# Allegro board C1T139A30_V1.2.brd
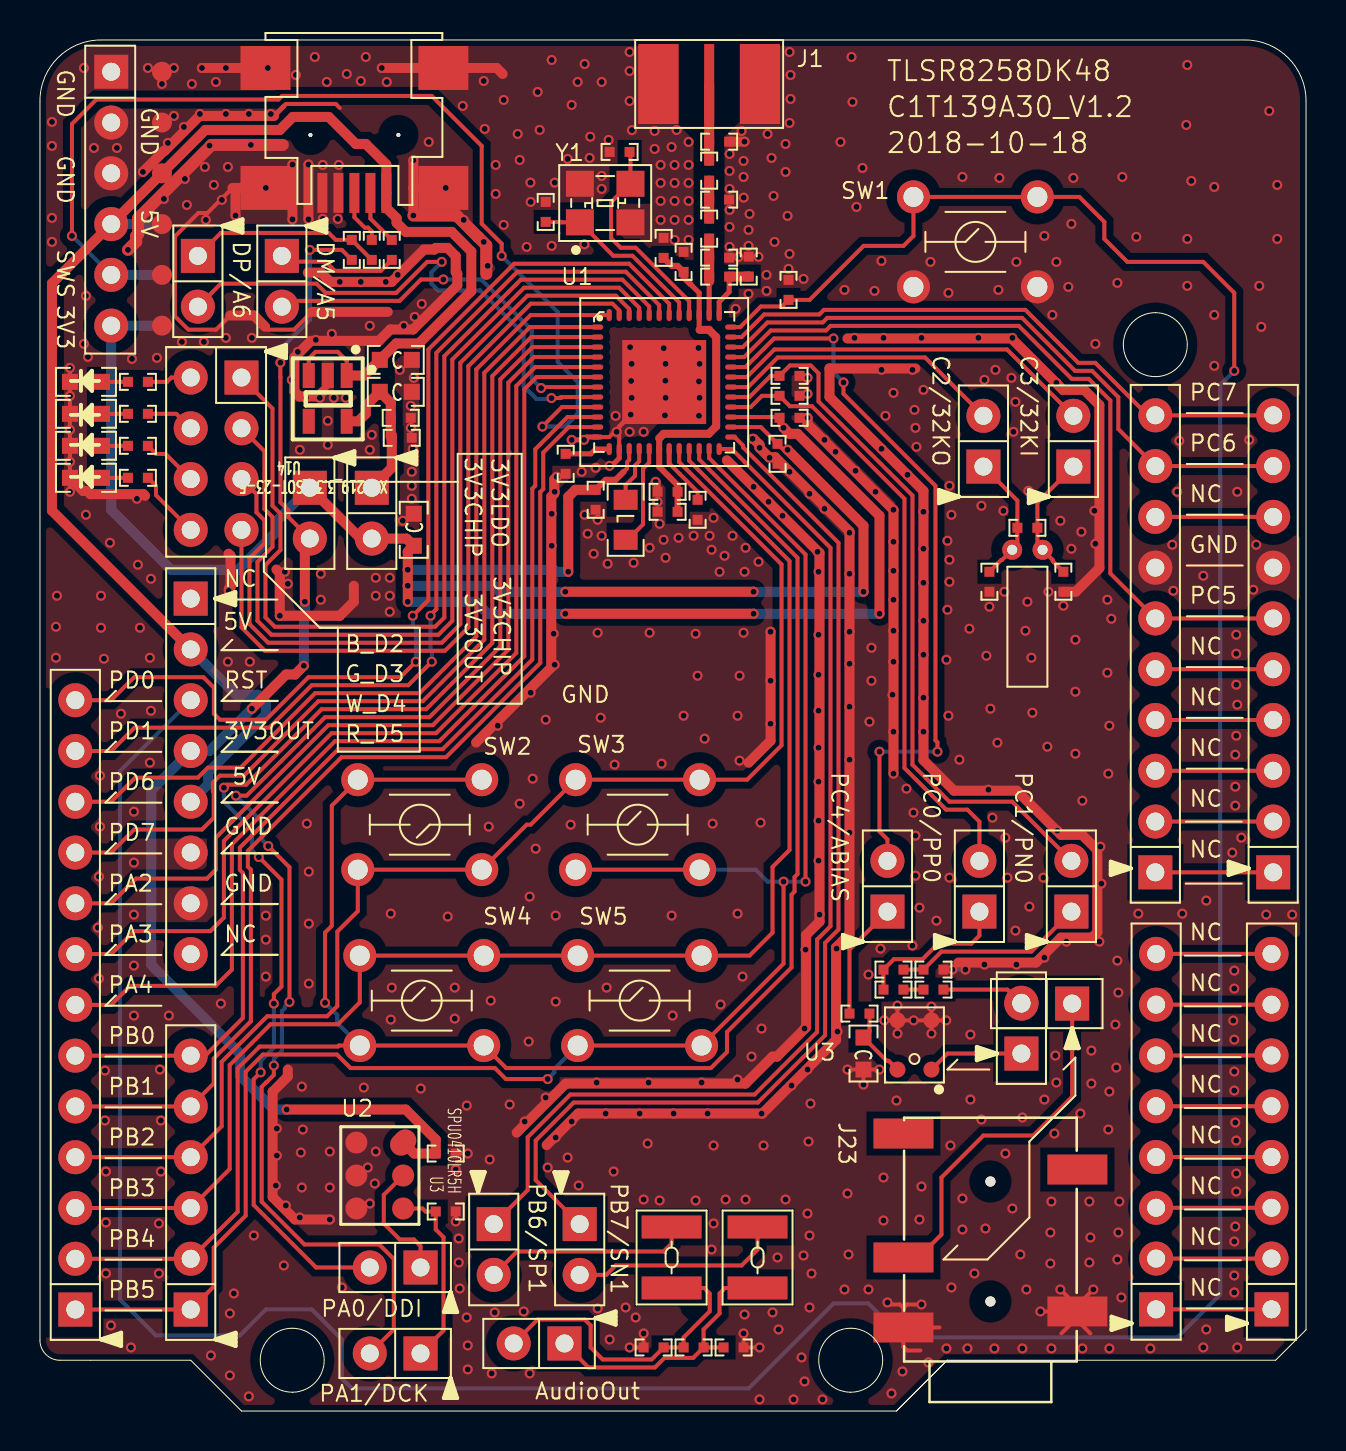
[diagram p0: board, top side]
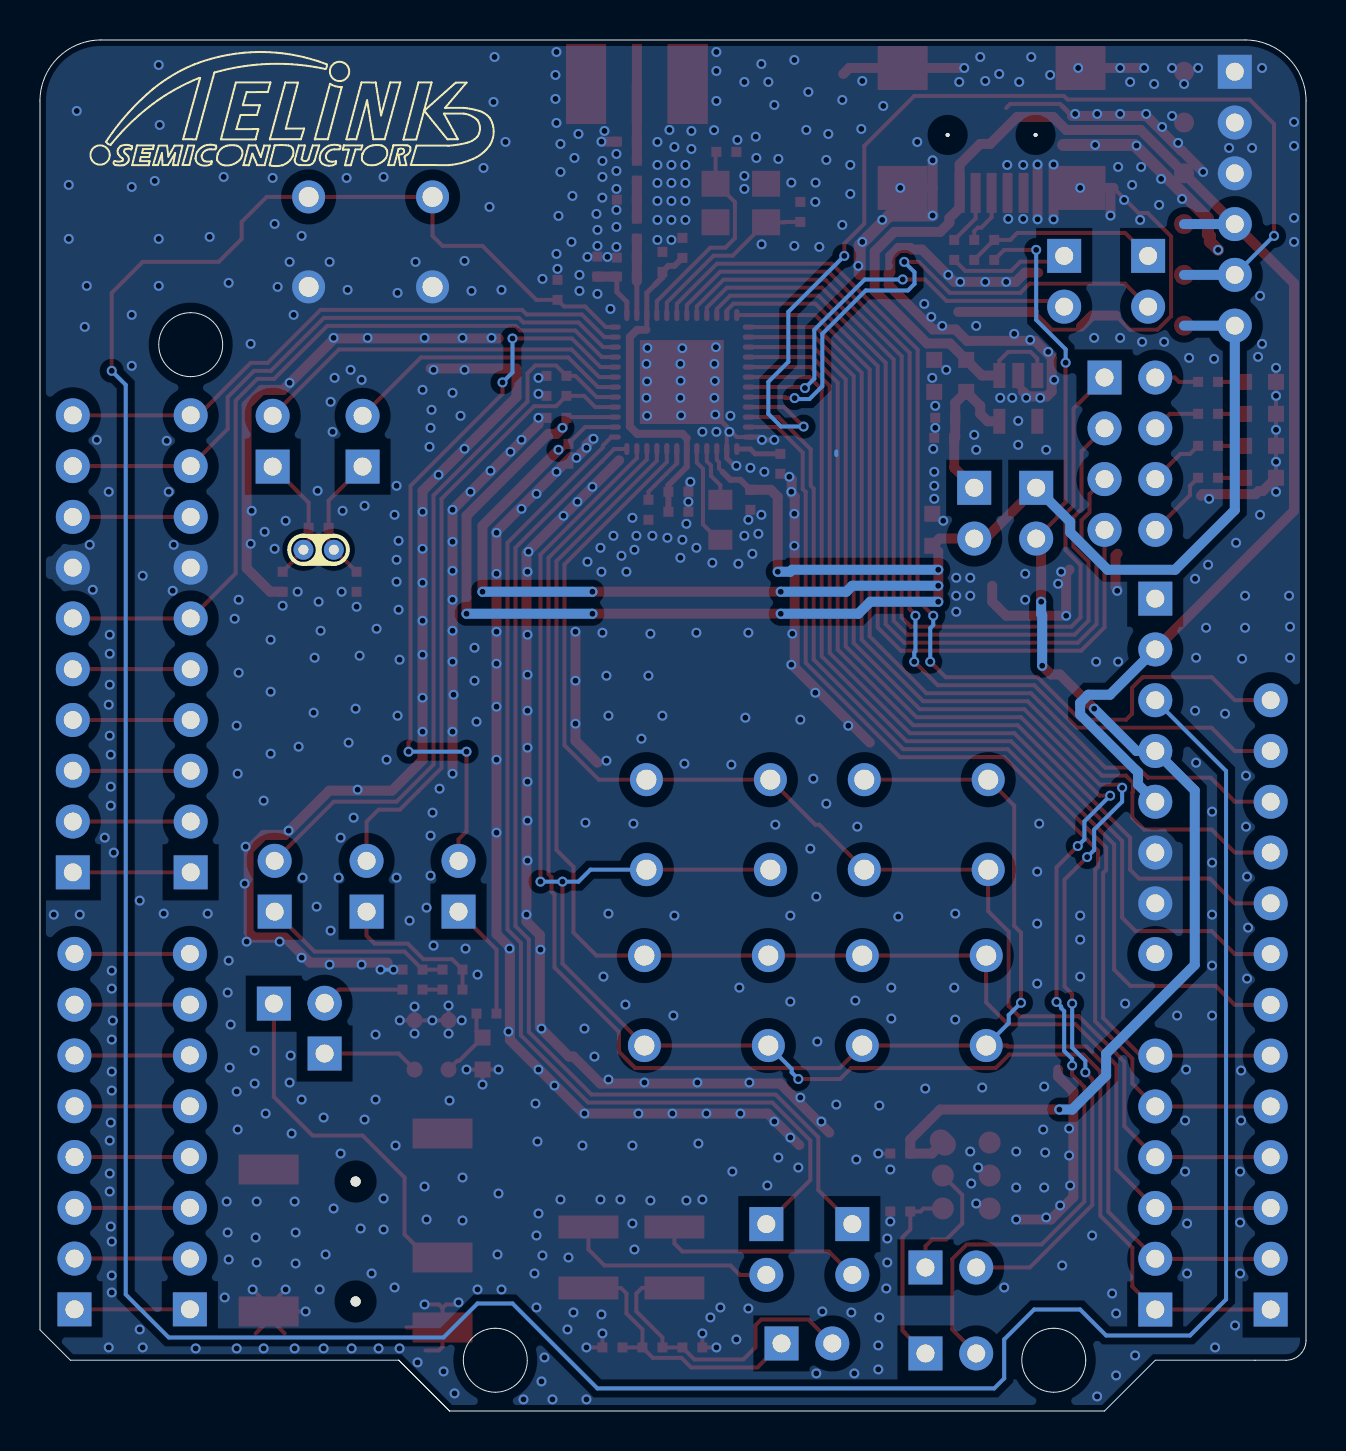
[diagram p1: board, bottom side, seen from below]

Outline 63.34 x 68.58 mm; copper layers: TOP, BOTTOM. Coordinates in mm from the lower left corner of the outline.
Outline path: 42.85,0 10.08,0 7.54,2.54 1,2.54 arc(0.29,2.83) 0,3.54 0,65.53 arc(0.89,67.69) 3.05,68.58 60.29,68.58 arc(62.45,67.69) 63.34,65.53 63.34,4.06 61.82,2.54 45.39,2.54 ; 42.85,0 45.39,2.54 ; 42.85,0 45.39,2.54 ; 12.62,4.14 arc(14.22,2.54) 12.62,0.94 arc(11.02,2.54) 12.62,4.14 ; 40.56,4.14 arc(42.16,2.54) 40.56,0.94 arc(38.96,2.54) 40.56,4.14 ; 55.8,54.94 arc(57.4,53.34) 55.8,51.74 arc(54.2,53.34) 55.8,54.94

## Placement (name value [footprint] x y rotation side)
C1  0.1uF  [0402]  32.2 57.48 270 top
C2  2.2uF  [0402]  31.2 58.18 270 top
C3  NC  [0402]  29 62.98 0 top
C4  NC  [0402]  25.3 59.98 270 top
C5  1.2pF  [0402]  33.98 57.69 180 top
C6  1.8pF  [0402]  33.98 60.59 180 top
C7  1pF  [0402]  33.98 63.49 180 top
C8  220pF  [0402]  33.48 59.14 90 top
C9  18pF  [0402]  35.46 57.25 90 top
C10  NC  [0402]  47.5 41.48 90 top
C11  NC  [0402]  51.2 41.48 90 top
C12  1uF  [0402]  37.5 49.68 0 top
C13  1uF  [0402]  36.9 47.88 270 top
C14  1uF  [0402]  26.3 47.38 90 top
C15  1uF  [0402]  37.45 56.08 270 top
C16  1uF  [0402]  27.8 45.58 270 top
C17  0.1uF  [0402]  31.4 45.98 180 top
C18  1uF  [0402]  31.4 44.98 180 top
C19  1uF  [0402]  32.9 45.08 270 top
C20  NC  [0402]  30.7 3.18 0 top
C21  220nF  [0402]  32.7 3.18 0 top
C22  0.1uF  [0402]  20.3 12.88 0 top
C23  NC  [0402]  34.7 3.18 0 top
C24  1uF  [0402]  44.7 21.08 0 top
C25  10pF  [0402]  37.5 50.78 180 top
C26  4.7uF  [0603C]  41.2 17.88 270 top
C27  1uF  [0402]  44.7 22.08 0 top
C28  10pF  [0402]  37.5 51.78 0 top
C29  10uF  [0603C]  18.7 44.08 90 top
C30  10uF  [0603C]  17.8 52.58 0 top
C31  10uF  [0603C]  17.8 50.98 0 top
C32  1nF  [0402]  18.1 48.68 0 top
C33  0.1uF  [0402]  18.05 49.68 0 top
D1  Blue  [0603-LED]  2.3 51.48 180 top
D2  Green  [0603-LED]  2.3 49.88 180 top
D3  White  [0603-LED]  2.3 48.28 180 top
D4  Red  [0603-LED]  2.3 46.68 180 top
J1  RFIN  [SMA-H]  33.48 66.38 270 top
J2  32KPC3  [HDR254F-1X2X850]  51.7 49.78 270 top
J4  32KPC2  [HDR254F-1X2X850]  47.2 49.78 270 top
J6  HEADER 13  [HDR254F-1X13X850]  1.77 35.56 270 top
J7  Left_Ardunio  [HDR254F-1X8X850]  7.54 22.86 90 top
J8  Right_Ardunio  [HDR254F-1X10X850]  55.8 49.81 270 top
J9  Right_Telink  [HDR254F-1X10X850]  61.7 49.81 270 top
J11  Right_Ardunio  [HDR254F-1X8X850]  55.84 22.87 270 top
J12  Right_Telink  [HDR254F-1X8X850]  61.61 22.87 270 top
J13  Left_Ardunio  [HDR254F-1X6X850]  7.54 17.78 270 top
J16  SDMB4  [HDR254F-1X2X850]  22.7 6.81 90 top
J17  SDMB5  [HDR254F-1X2X850]  27 6.81 90 top
J18  Debug  [HDR254F-1X6X850_TELINKDEBUG]  3.56 54.29 90 top
J20  MICPC4  [HDR254F-1X2X850]  42.4 27.52 270 top
J22  MICPC0  [HDR254F-1X2X850]  47 27.52 270 top
J23  PJ327  [PJ-327]  47.55 2.48 180 top
J25  MICPC1  [HDR254F-1X2X850]  51.6 27.52 270 top
J26  USB_MiniABF  [USB-MINI-F5]  15.73 60.93 180 top
J27  DM/A5  [HDR254F-1X2X850]  12.1 55.24 90 top
J28  DP/A6  [HDR254F-1X2X850]  7.9 55.24 90 top
J29  Chip3V3  [HDR254F-1X2X850]  16.6 43.64 90 top
J35  IO3V3  [HDR254F-1X2X850]  13.5 43.64 90 top
J36  MICIN  [HDR254F-1X2X850]  49.1 20.42 270 top
J37  LINEIN  [HDR254F-1X2X850]  49.1 20.38 0 top
J38  LED  [HDR254F-2X4X850]  10.08 41.54 90 top
J39  AudioOut  [HDR254F-1X2X850]  23.7 3.38 0 top
J40  DMICCK  [HDR254F-1X2X850]  16.5 2.88 0 top
J41  DMICDI  [HDR254F-1X2X850]  16.5 7.18 0 top
L1  1.3nH  [0402]  33.98 56.74 180 top
L2  3.3nH  [0402]  33.48 62.04 90 top
L3  47uH  [0805L]  29.3 44.58 90 top
L4  150uH  [INDM3025X25]  31.6 7.68 270 top
L5  150uH  [INDM3025X25]  35.9 7.68 270 top
R1  NC  [0402]  49.4 44.18 0 top
R2  100K  [0402]  20.3 9.98 180 top
R3  1K  [0402]  4.9 51.48 180 top
R4  1K  [0402]  4.9 49.88 180 top
R5  1K  [0402]  4.9 48.28 180 top
R6  1K  [0402]  4.9 46.68 180 top
R7  0R  [0402]  41 19.88 0 top
R8  000R  [0402]  42.7 21.08 0 top
R9  NC  [0402]  42.7 22.08 0 top
R10  33  [0402R]  17.6 58.08 270 top
R11  33  [0402R]  16.6 58.08 270 top
R12  NC/1.5K  [0402R]  15.6 58.08 270 top
SW1  SW4PIN_4.5x4.5  [BUTDIP4P_5P0X3P0]  46.8 58.48 0 top
SW2  Key1  [BUTDIP4P_5P0X3P0]  19 29.33 180 top
SW3  Key2  [BUTDIP4P_5P0X3P0]  29.9 29.33 0 top
SW4  Key3  [BUTDIP4P_5P0X3P0]  19.1 20.53 0 top
SW5  Key4  [BUTDIP4P_5P0X3P0]  30 20.53 0 top
U1  TLSR8258F512ET48  [QFN_7X7_48PIN_0P5_4P20X4P20]  31.23 51.47 0 top
U2  SPM0423HM4H-WB  [DMIC_SPM0423HM4H-WB]  17 11.78 270 top
U3  MWW7037AT2  [GA_BFA423_A83]  43.75 18.31 180 top
U4  CE1132-33M  [SOT-23-5]  14.4 50.65 180 top
Y1  24MHz-12pF-+/-20ppm  [OSCCC250X320X110]  28.28 60.42 90 top
Y2  32.768KHz - 9pf - +/-20ppm  [OSC_2X6]  49.4 39.08 90 top

## Library data of the parts
C1 C2 C12 C13 C16-C19 C22 C29-C33 = C1005X5R1C104K
C3 C4 C20 C23 = C1005_NC
C5-C8 C10 C11 = C1608_NC
C9 = C1005C0G1H100D
C14 C15 C24 C27 = C1005X5R1C105K
C21 = C1005X5R1C224M
C25 C28 = C1005C0G1H223J
C26 = C1608X5R0J475M
D1-D4 = 0603D_Green
J1 = SMA_JACK_2
J2 J4 J16 J17 J20 J22 J25 J27-J29 J35-J37 J39-J41 = B2S_3: User Part Number: pn; Tolerance: RichardLC
J6 = HEADER 13: User Part Number: pn; Tolerance: RichardLC
J7 J11 J12 = HEADER 8: User Part Number: pn; Tolerance: RichardLC
J8 J9 = HEADER 10: Tolerance: RichardLC; User Part Number: pn
J13 = HEADER 6: User Part Number: pn; Tolerance: RichardLC
J18 = CON_0.54mm_2x6: User Part Number: pn; Tolerance: RichardLC
J23 = PJ327_2
J26 = USB_MiniABF_5pin: Tolerance: RichardLC; User Part Number: pn
J38 = HEADER 4X2: User Part Number: pn; Tolerance: RichardLC
L1 L2 = MLK1608_000R
L3 = IND_0
L4 L5 = IND_150uH_3025
R1 = RS0603K102JT
R2 = RS0402K104JT
R3-R6 = RS0402K102JT
R7-R9 = RS0402K472JT
R10 R11 = RS0603K330JT
R12 = RS0603K152JT
SW1-SW5 = SW4PIN_0.5
U1 = TLSR8258F512ET48
U2 = LD1117/SO_0
U3 = MULPS4CX-RM5_0
U4 = XC6219_6.3V_SOT-23-5
Y1 = CRYSTAL4/SM_0: Tolerance: RichardLC
Y2 = OSC_2x6_2pin_16Mhz

## Footprints (pads in the part's own frame, mm; a bottom-side part is the same pattern mirrored in y, then rotated)
0402
  rect 0.5x0.5 smd: 1(-0.5,0) 2(0.5,0)
0402R
  rect 0.5x0.5 smd: 1(-0.5,0) 2(0.5,0)
0603-LED
  rect 0.8x0.8 smd: A(-0.8,0) C(0.8,0)
0603C
  rect 0.8x0.8 smd: 1(-0.8,0) 2(0.8,0)
0805L
  rect 1x1.2 smd: 1(-1,0) 2(1,0)
BUTDIP4P_5P0X3P0
  round 1.65 hole 1: 1(-3.1,2.25) 2(-3.1,-2.25) 3(3.1,2.25) 4(3.1,-2.25)
DMIC_SPM0423HM4H-WB
  round 1.1 smd: 1(-1.65,-1.17) 2(0,-1.17) 3(1.65,-1.17) 4(1.65,1.17) 5(0,1.17)
  oval 1.4x1.1 smd rot 135: 6(-1.65,1.17)
GA_BFA423_A83
  round 0.8 smd: 1(-0.85,1.23) 2(-0.85,-1.23) 3(0.85,-1.23) 4(0.85,1.23)
HDR254F-1X2X850
  rect 1.7x1.7 hole 0.9: 1(2.54,0)
  round 1.7 hole 0.9: 2(0,0)
HDR254F-1X6X850
  rect 1.7x1.7 hole 0.9: 1(12.7,0)
  round 1.7 hole 0.9: 2(10.16,0) 3(7.62,0) 4(5.08,0) 5(2.54,0) 6(0,0)
HDR254F-1X6X850_TELINKDEBUG
  rect 1.7x1.7 hole 0.9: 1(12.7,0)
  round 1.7 hole 0.9: 2(10.16,0) 3(7.62,0) 4(5.08,0) 5(2.54,0) 6(0,0)
  round 1 smd: 7(0,-2.54) 8(2.54,-2.54) 9(5.08,-2.54) 10(7.62,-2.54) 11(10.16,-2.54) 12(12.7,-2.54)
HDR254F-1X8X850
  rect 1.7x1.7 hole 0.9: 1(17.78,0)
  round 1.7 hole 0.9: 2(15.24,0) 3(12.7,0) 4(10.16,0) 5(7.62,0) 6(5.08,0) 7(2.54,0) 8(0,0)
HDR254F-1X10X850
  rect 1.7x1.7 hole 0.9: 1(22.86,0)
  round 1.7 hole 0.9: 2(20.32,0) 3(17.78,0) 4(15.24,0) 5(12.7,0) 6(10.16,0) 7(7.62,0) 8(5.08,0) 9(2.54,0) 10(0,0)
HDR254F-1X13X850
  rect 1.7x1.7 hole 0.9: 1(30.48,0)
  round 1.7 hole 0.9: 2(27.94,0) 3(25.4,0) 4(22.86,0) 5(20.32,0) 6(17.78,0) 7(15.24,0) 8(12.7,0) 9(10.16,0) 10(7.62,0) 11(5.08,0) 12(2.54,0) 13(0,0)
HDR254F-2X4X850
  rect 1.7x1.7 hole 0.9: 1(10.16,0)
  round 1.7 hole 0.9: 2(10.16,2.54) 3(7.62,0) 4(7.62,2.54) 5(5.08,0) 6(5.08,2.54) 7(2.54,0) 8(2.54,2.54)
INDM3025X25
  rect 1.15x3 smd: 1(-1.525,0) 2(1.525,0)
OSC_2X6
  round 1 hole 0.5: 1(4,0.76) 2(4,-0.76)
OSCCC250X320X110
  rect 1.3x1.4 smd: 1(-0.965,1.265) 2(-0.965,-1.265) 3(0.965,-1.265) 4(0.965,1.265)
PJ-327
  round 0.5 hole 1: (0,-3) (0,-9)
  rect 3x1.5 smd: 1(-4.35,-2.5) 2(4.35,-5.2) 3(-4.35,-9.6) 4(4.35,-11.4) 5(4.35,-1.7)
QFN_7X7_48PIN_0P5_4P20X4P20
  oval 0.6x0.26 smd: 1(-3.35,2.75) 2(-3.35,2.25) 3(-3.35,1.75) 4(-3.35,1.25) 5(-3.35,0.75) 6(-3.35,0.25) 7(-3.35,-0.25) 8(-3.35,-0.75) 9(-3.35,-1.25) 10(-3.35,-1.75) 11(-3.35,-2.25) 12(-3.35,-2.75) 25(3.35,-2.75) 26(3.35,-2.25) 27(3.35,-1.75) 28(3.35,-1.25) 29(3.35,-0.75) 30(3.35,-0.25) 31(3.35,0.25) 32(3.35,0.75) 33(3.35,1.25) 34(3.35,1.75) 35(3.35,2.25) 36(3.35,2.75)
  oval 0.26x0.6 smd: 13(-2.75,-3.35) 14(-2.25,-3.35) 15(-1.75,-3.35) 16(-1.25,-3.35) 17(-0.75,-3.35) 18(-0.25,-3.35) 19(0.25,-3.35) 20(0.75,-3.35) 21(1.25,-3.35) 22(1.75,-3.35) 23(2.25,-3.35) 24(2.75,-3.35) 37(2.75,3.35) 38(2.25,3.35) 39(1.75,3.35) 40(1.25,3.35) 41(0.75,3.35) 42(0.25,3.35) 43(-0.25,3.35) 44(-0.75,3.35) 45(-1.25,3.35) 46(-1.75,3.35) 47(-2.25,3.35) 48(-2.75,3.35)
  rect 4.2x4.2 smd: 49(0,0)
SMA-H
  rect 4x0.5 smd: 1(0,0)
  rect 4x2 smd: 2(0,-2.54) 3(0,2.54) 4(0,-2.54) 5(0,2.54)
SOT-23-5
  rect 0.6x1.25 smd: 1(-0.95,-1.145) 2(0,-1.145) 3(0.95,-1.145) 4(0.95,1.145) 5(-0.95,1.145)
USB-MINI-F5
  round 0.2 hole 0.9 unplated: (-2.2,-2.9) (2.2,-2.9)
  rect 0.5x2 smd: 1(-1.6,0) 2(-0.8,0) 3(0,0) 4(0.8,0) 5(1.6,0)
  rect 2.5x2.2 smd: 6(-4.45,-6.25) 7(4.45,-6.25) 8(-4.45,-0.25) 9(4.45,-0.25)

## Nets
1V2: C1.2 C2.2 C17.1 C18.1 U1.18(VDD1V2) U1.39(AVDD1V2)
3V3: C31.1 C32.1 C33.1 J29.1 U4.5(VOUT)
GND: C1.1 C2.1 C3.1 C4.1 C5.1 C6.1 C7.1 C9.2 C10.1 C11.1 C12.2 C13.2 C14.1 C15.1 C16.2 C17.2 C18.2 C19.2 C20.1 C22.2 C23.2 C25.1 C26.2 C27.2 C28.2 C29.2 C30.2 C31.2 C32.2 C33.2 D1.C(CATHODE) D2.C(CATHODE) D3.C(CATHODE) D4.C(CATHODE) J1.2 J1.3 J1.4 J1.5 J7.6 J7.7 J8.7 J9.7 J18.1 J18.2 J18.3 J18.10 J18.11 J18.12 J23.1 J23.5 J26.4(ID) J26.5(GND) J26.6(S1) J26.7(S2) J26.8(S3) J26.9(S4) R2.1 SW1.2 SW1.4 U1.12(DVSS#12) U1.14(DVSS#14) U1.49(GND) U2.1(GND#1) U2.2(SE) U2.3(GND#3) U3.2(GND#2) U3.3(GND#3) U4.2(VSS) Y1.2 Y1.4
TL_5V: C30.1 J7.2 J7.5 J18.4 J18.9 J26.1(V_BUS) U4.1(VIN) U4.3(CE)
TL_32KI_C3: J2.2 U1.31(P1/URX/I2CCK/32KI/PGAN1/C[3])
TL_32KO_C2: J4.2 U1.30(P0/7816TRX/I2CSDA/32KO/PGAP1/C[)
TL_AS0_C5: J8.6 J9.6 U1.33(P3N/URX/ATSEL0/C[5])
TL_AS1_C6: J8.9 J9.9 U1.34(CYC2LNA/ATSEL1/P4N/C[6])
TL_AS2_C7: J8.10 J9.10 U1.35(CYC2PA/ATSEL2/P5N/C[7])
TL_BIAS_C4: J20.2 U1.32(P2/UCTS/P0N/BIAS/C[4])
TL_CK_A4: J6.7 U1.6(CK/URTS/P2/A[4])
TL_CN_D6: J6.11 U1.48(CN/URX/ATSEL0/D[6])
TL_D0: J6.13 U1.42(CYC2LNA/7816TRX/D[0])
TL_D1: J6.12 U1.43(CYC2PA/UCTS/D[1])
TL_D7: J6.10 U1.1(CK/I2SBCK/7816TRX/D[7])
TL_DI_A3: J6.8 U1.5(DI/UCTS/P1/A[3])
TL_DM_A5: J27.2 U1.7(DM/A[5])
TL_DMICCK_A1: J40.2 U1.3(DMIC_CK/7816CLK/I2SCK/A[1])
TL_DMICDI_A0: J41.2 U1.2(DMIC_DI/P0N/URX/A[0])
TL_DO_A2: J6.9 U1.4(DO/UTX/P0/A[2])
TL_DP_A6: J28.2 U1.8(DP/A[6])
TL_IO: C22.1 J7.4 J35.2 R12.2 U2.6(POWER)
TL_KEY_B2: J6.4 J13.4 SW2.1 SW2.3 SW3.1 SW3.3 U1.20(P5/UCTS/CYC2LNA/B[2])
TL_KEY_B3: J6.3 J13.3 SW4.1 SW4.3 SW5.1 SW5.3 U1.21(P0N/URTS/CYC2PA/B[3])
TL_KEY_B4: J6.2 J13.2 SW2.2 SW2.4 SW4.2 SW4.4 U1.22(SDMP0/P4/B[4])
TL_KEY_B5: J6.1 J13.1 SW3.2 SW3.4 SW5.2 SW5.4 U1.23(SDMN0/P5/B[5])
TL_P0_D5: J38.7 U1.47(P0/P0N/D[5])
TL_P1N_D3: J38.3 U1.45(P1N/I2SSDI/7816TRX/D[3])
TL_P2N_D4: J38.5 U1.46(SWM/I2SSDO/P2N/D[4])
TL_P3_D2: J38.1 U1.44(CN/I2SLR/P3/D[2])
TL_PGAN0_C1: C28.1 J25.2 U1.29(I2CCK/P1N/P0/PGAN0/C[1])
TL_PGAP0_C0: C25.2 J22.2 U1.28(I2CSDA/P4N/URTS/PGAP0/C[0])
TL_RST: C15.2 J7.3 SW1.1 SW1.3 U1.36(RESETB)
TL_SDMN1_B7: J17.1 U1.25(SDMN1/DO/URX/B[7])
TL_SDMP1_B6: J16.1 U1.24(SDMP1/DI/URTS/B[6])
TL_SWS_A7: J18.5 J18.8 U1.9(SWS/URTS/A[7])
TL_URX_B0: J6.6 J13.6 U1.10(P3/URX/ATSEL1/B[0])
TL_UTX_B1: J6.5 J13.5 U1.11(P4/UTX/ATSEL2/B[1])
TL_VANT: C12.1 C13.1 C16.1 C29.1 J18.6 J18.7 J29.2 J35.1 U1.15(VDD_IO) U1.26(VDD3) U1.27(VDDIO_AMS)
TL_XC1: C3.2 U1.40(XC1) Y1.3
TL_XC2: C4.2 U1.41(XC2) Y1.1
N19472288: J38.4 R4.1
N19472291: J38.8 R6.1
N19472372: J16.2 L4.1
N19472375: J17.2 L5.1
N19472414: C20.2 C21.1 J39.2 L4.2
N19472431: C21.2 C23.1 J39.1 L5.2
N19472505: J38.2 R3.1
N19497696: J38.6 R5.1
N19519268: C11.2 J2.1 R1.2 Y2.2
N19519271: C10.2 J4.1 R1.1 Y2.1
N19526123: J28.1 R11.2 R12.1
N19526133: J26.3(D+) R11.1
N19526168: J26.2(D-) R10.1
N19527038: J27.1 R10.2
N19571642: C19.1 U1.19(VDD_F)
N19571697: C14.2 U1.13(VDD1V)
N19571729: L3.1 U1.17(VDCDC)
N19571735: L3.2 U1.16(VDCDC_SW)
N19572953: C6.2 C8.2 L2.1
N19572955: C5.2 C8.1 L1.2 U1.38(ANT)
N19572993: C9.1 L1.1 U1.37(VANT)
N19573037: C7.2 J1.1 L2.2
N19581488: J20.1 R7.1
N19581490: C27.1 J25.1 R9.2
N19581502: C26.1 R7.2 U3.4(VDD)
N19581582: J22.1 R8.1 R9.1
N19581635: C24.1 R8.2
N19581732: J23.2 J37.1
N19602515: C24.2 J36.2 J37.2
N19606656: J40.1 R2.2 U2.4(CLOCK)
N19606659: J41.1 U2.5(DATA)
N19611810: J8.5 J9.5
N19611817: J8.4 J9.4
N19611824: J8.3 J9.3
N19611831: J8.2 J9.2
N19611838: J8.1 J9.1
N19611845: J8.8 J9.8
N19611852: J11.8 J12.8
N19611859: J11.6 J12.6
N19611866: J11.7 J12.7
N19611873: J11.5 J12.5
N19611880: J11.4 J12.4
N19611887: J11.3 J12.3
N19611894: J11.2 J12.2
N19611901: J11.1 J12.1
N194723011: D4.A(ANODE) R6.2
N194723090: D1.A(ANODE) R3.2
N194723171: D2.A(ANODE) R4.2
N194723250: D3.A(ANODE) R5.2
N195815302: J36.1 U3.1(OUTPUT)

Pads without a net: J7 1 8; J23 3 4; U4 4

## Via types
v1: diameter 0.5, hole 0.3, TOP to BOTTOM, 782 vias

## Routing (per net, layer and track width the routed paths; a pad name or vN(x,y) marks a point on that pad's centre or on a via; arc(x,y) is an arc through that point)
1V2: length 17.1
  TOP w0.25: 33,54.08 32.98,54.1 U1.39 32.98,55.93 32.55,56.36
  TOP w0.3: C2.2 31.6,57.28 31.9,57.28 C1.2 32.2,56.71 32.55,56.36 ; 30.98,48.66 U1.18 30.98,47.23 31.9,46.31 C17.1 C18.1
  TOP w0.4: 30.98,48.66 31.2,48.88 33.46,48.88 33.83,49.25 33.83,53.72 33.47,54.08 33,54.08
3V3: length 8
  TOP w0.5: U4.5 15.93,49.51 16.3,49.88 16.3,50.28 C31.1 17.55,50.43 C33.1 17.55,48.73 C32.1 17.6,47.18 J29.1
GND: length 373.1
  TOP w0.2: U3.3 v1(43.71,19.54) U3.2 ; U3.3 v1(42.24,19.54) ; U3.3 v1(42.9,20.28) ; U3.3 v1(42.9,18.88) ; v1(30.2,3.88) C20.1 v1(29.5,3.18) ; 12.21,65.27 12.31,65.38 14.8,65.38 15,65.18 ; R2.1 v1(20.8,9.48) ; v1(51.05,6.08) 51.9,5.23 ; 51.9,5.23 J23.1 ; 51.9,5.23 51.9,5.28 v1(52.7,6.08) ; Y1.2 29.72,59.46 30.02,59.16 ; U1.49 28.48,48.72 U1.12 ; 43.2,5.15 43.38,5.33 v1(44.1,5.33) ; 43.2,5.15 J23.5 ; 43.2,5.15 43.02,5.33 42.3,5.33 ; 14.17,51 14.4,51.23 U4.2 ; 9.52,54.8 8.81,54.09 7.42,54.09 6.75,54.76 6.75,58.75 7.92,59.92 8.38,59.92 9.63,61.18 ; C26.2 v1(41.2,16.33) ; C26.2 v1(40.4,17.08) ; C26.2 v1(42,17.08) ; C25.1 38.3,50.78 v1(38.4,50.88) ; J23.5 45,4.18 ; J23.5 43.2,3.21 43.38,3.03 44.05,3.03 ; U3.2 v1(44.6,20.23) ; U3.2 v1(44.6,18.88) ; U3.2 v1(45.34,19.54) ; J23.1 v1(50.05,4.98) ; J23.1 51.9,4.68 ; 51.9,4.68 51.1,3.88 ; 51.9,4.68 51.9,4.53 52.55,3.88 ; v1(1.5,45.98) D4.C v1(1.5,47.48) D3.C v1(1.5,49.08) D2.C v1(1.5,50.78) D1.C v1(1.5,52.18) ; v1(38.4,51.68) 38.3,51.78 C28.2 ; 11.26,54.24 11.41,54.09 12.71,54.09 13.6,54.98 ; v1(36,3.18) C23.2 v1(35.2,3.88) ; C12.2 v1(38.4,49.68) ; C22.2 v1(21.4,12.88) ; v1(37.5,46.98) 37.1,47.38 C13.2 ; v1(29.55,49.84) 28.98,49.27 U1.14 ; C27.2 v1(45.65,22.08)
  TOP w0.25: 11.71,64.78 12.21,65.27 ; 28.7,47.38 28.98,47.66 U1.14 ; U1.12 27.36,48.72 v1(27.22,48.58) v1(26.6,48.58)
  TOP w0.3: C17.2 30.9,46.48
  TOP w0.5: 25.35,13.3 26.93,14.88 v1(28.3,14.88) v1(30,14.88) v1(31.7,14.88) v1(33.4,14.88) v1(36.1,14.88) 36.14,14.88 39.83,18.57 39.83,23.19 40.5,23.86 v1(40.5,28.93) v1(40.5,32.58) v1(40.5,35.23) v1(40.5,37.38) v1(40.5,38.98) v1(40.5,41.88) v1(40.5,43.93) 40.5,43.99 36.78,47.71 36.47,47.71 v1(36,48.18) 36,48.33 35.7,48.63 v1(35.65,48.63) ; v1(38.4,49.68) 38.4,49.37 42.7,45.07 v1(42.7,43.48) v1(42.7,42.03) v1(42.7,40.58) v1(42.7,39.03) v1(42.7,37.48) v1(42.7,33.98) 42.7,31.94 ; 5.26,45.78 5.18,45.86 2.53,45.86 2.37,46.02 2.16,46.02 D4.C ; 34.36,47.56 39,42.92 v1(39,24.83) 39,24.48 38.33,23.81 38.33,19.19 36.87,17.73 36.65,17.73 35.3,16.38 26.31,16.38 23.85,13.92 ; 11.83,42.09 12,41.92 v1(12,39.78) 15,39.78 15.7,40.48 15.7,41.28 ; 18.68,61.18 v1(18.68,59.8) ; 18.68,61.18 v1(18.68,62.56) ; 18.68,61.18 J26.8 v1(20.3,61.18) ; 21.82,33.43 25.58,37.19 25.58,45.74 25.73,45.89 25.73,46.61 v1(25.85,46.73) ; 14.17,51 13.92,50.75 12.97,50.75 12.73,51 12.73,52.7 13.56,53.53 16.96,53.53 17.53,54.1 18.67,54.1 20.88,56.31 20.88,56.89 20.8,56.97 20.8,57.77 20.39,58.18 19.81,58.18 19.73,58.1 19.21,58.1 17.59,56.48 v1(17.3,56.48) v1(16.05,56.48) v1(15,56.48) 14.52,56.48 14.06,56.94 13.4,56.94 ; v1(11.3,61.18) J26.9 9.78,61.18 ; 12.4,17.08 12.4,16.73 11.64,15.97 11.64,10.7 12.76,9.58 v1(14.5,9.58) ; 43.8,52.15 39.5,52.15 39.5,50.72 44.2,46.02 v1(44.2,44.98) v1(44.2,43.13) v1(44.2,41.43) v1(44.2,39.53) v1(44.2,37.83) v1(44.2,35.68) v1(44.2,33.98) 44.2,32.56 45.73,31.03 48.87,31.03 51.08,28.82 52.14,28.82 52.9,28.06 52.9,23.94 52.64,23.68 51.08,23.68 49.83,22.43 45.95,22.43 ; v1(8.1,67.18) J26.7 v1(11.4,67.18) ; C7.1 v1(35.25,63.49) ; 9.43,42.88 9.53,42.79 9.53,41.21 9.45,41.13 v1(9.45,41.03) ; v1(9.78,59.8) 9.78,61.18 ; 9.78,61.18 9.63,61.18 ; 23.15,66.88 22.85,67.18 J26.6 v1(17.1,67.18) ; 9.52,54.8 10.7,54.8 11.26,54.24 ; v1(12.63,62.35) v1(12.63,59.61) ; C11.1 51.82,40.98 53,42.16 53,50.32 52.24,51.08 51.18,51.08 48.61,53.65 40.4,53.65 ; 13.6,54.98 17.4,54.98 ; v1(36.55,38.98) v1(36.55,36.53) v1(36.55,34.38) 36.55,33.53 35.45,32.43 ; v1(13.43,62.35) v1(13.43,59.61) ; v1(5.15,61.98) 6.21,63.04 6.24,63.04 7.98,64.78 11.71,64.78
  TOP w0.6: v1(4.4,58.08) 4.81,58.49 4.81,58.77 4.91,58.87 4.91,59.66 8.58,63.33 v1(10.55,63.33) 12.15,63.33 ; 22.33,56.88 22.33,58.31 21.93,58.71 20.84,59.8 v1(18.68,59.8)
  BOTTOM w0.2: 23.5,48 23.5,47.82 ; v1(45.65,22.08) v1(46.3,22.08)
  vias: v1(0.6,64.48) v1(0.6,63.28) v1(0.6,59.68) v1(0.6,58.48) v1(0.85,40.78) v1(0.8,39.23) v1(0.8,37.68) v1(2.2,67.18) v1(2.2,53.38) v1(2.3,55.78) v1(2.3,44.83) v1(2.4,52.73) v1(2.7,63.18) v1(2.9,24.18) v1(3.05,40.78) v1(3.05,39.18) v1(3,31.78) v1(3,29.23) v1(2.95,26.73) v1(2.95,21.63) v1(3.2,37.63) v1(3.25,17.03) v1(3.25,14.53) v1(3.3,11.98) v1(3.3,9.43) v1(3.3,6.88) v1(3.5,43.43) v1(3.55,4.28) v1(3.85,63.18) v1(4.05,34.88) v1(4.55,3.18) v1(4.6,52.63) v1(4.7,29.98) v1(4.7,27.43) v1(4.7,24.83) v1(4.7,22.28) v1(4.7,19.78) v1(4.85,45.63) v1(4.9,42.33) v1(5,39.18) v1(5.4,67.18) v1(5.55,41.63) v1(5.5,37.68) v1(5.55,35.03) v1(5.5,32.43) v1(5.85,52.68) v1(6,17.08) v1(6.05,14.53) v1(6.05,11.98) v1(5.95,9.38) v1(5.95,6.88) v1(6.1,66.38) v1(6.2,60.63) v1(6.4,63.43) v1(6.45,19.78) v1(6.7,67.18) v1(6.7,64.78) v1(7.1,53.48) v1(7.2,64.23) v1(7.25,61.63) v1(7.35,60.33) v1(7.6,66.38) v1(8,64.88) v1(8.25,62.23) v1(8.2,53.48) v1(8.3,59.58) v1(8.48,63.3) v1(8.55,2.78) v1(8.7,61.33) v1(8.8,66.48) v1(9.1,60.58) v1(9.05,20.38) v1(9.3,67.18) v1(9.3,64.88) v1(9.3,53.68) v1(9.4,62.23) v1(9.4,37.48) v1(9.5,4.88) v1(9.5,1.78) v1(9.7,5.88) v1(10.45,64.88) v1(10.45,0.73) v1(10.5,37.48) v1(10.6,53.68) v1(10.7,8.78) v1(11.3,24.78) v1(11.3,23.58) v1(11.3,21.73) v1(11.55,64.88) v1(11.85,14.13) v1(11.85,12.78) v1(11.8,11.28) v1(12.25,41.98) v1(12.2,7.28) v1(12.3,10.28) v1(12.4,41.38) v1(12.6,51.58) v1(12.8,66.83) v1(12.9,52.98) v1(13,48.08) v1(13,9.68) v1(13.1,16.23) v1(13.05,12.93) v1(13.1,11.18) v1(13.15,14.08) v1(13.3,50.68) v1(13.35,29.38) v1(13.45,26.98) v1(13.45,24.38) v1(13.45,21.38) v1(13.75,67.73) v1(13.8,53.58) v1(14,50.68) v1(14.05,41.88) v1(14.05,40.58) v1(14.15,62.33) v1(14.15,59.63) v1(14.35,66.48) v1(14.4,49.53) v1(14.4,48.33) v1(14.5,12.98) v1(14.5,11.18) v1(14.6,53.88) v1(14.7,50.68) v1(14.95,62.33) v1(14.9,59.63) v1(15.1,6.18) v1(15.35,66.88) v1(15.3,50.68) v1(16.05,66.53) v1(16.2,16.18) v1(16.3,67.73) v1(16.4,12.18) v1(16.5,54.28) v1(16.5,48.08) v1(16.5,10.38) v1(16.6,48.83) v1(16.8,41.68) v1(16.8,40.78) v1(16.8,12.98) v1(16.75,11.38) v1(17.35,66.48) v1(17.5,41.68) v1(17.5,40.78) v1(17.5,39.98) v1(17.55,24.88) v1(17.6,21.18) v1(17.55,19.58) v1(17.9,56.83) v1(18,52.08) v1(18.15,44.53) v1(18.2,54.28) v1(18.55,50.28) v1(18.55,49.18) v1(18.65,48.13) v1(18.6,46.98) v1(18.6,46.28) v1(18.6,45.63) v1(18.7,51.68) v1(18.75,54.73) v1(19.1,55.38) v1(19.05,16.13) v1(19.45,63.48) v1(20.4,24.73) v1(20.75,21.18) v1(20.75,19.63) v1(20.8,12.08) v1(20.95,8.63) v1(20.95,7.43) v1(21,6.13) v1(21.15,65.28) v1(21.2,59.58) v1(21.35,15.28) v1(21.35,4.68) v1(21.4,3.28) v1(21.4,2.08) v1(22.2,66.53) v1(22.25,64.13) v1(22.2,58.48) v1(22.4,57.28) v1(22.45,29.23) v1(22.5,12.58) v1(22.55,20.53) v1(22.6,1.88) v1(22.8,62.33) v1(22.8,60.88) v1(22.75,4.93) v1(22.9,34.28) v1(23.2,65.58) v1(23.2,59.33) v1(23.5,15.33) v1(23.9,63.88) v1(24,62.58) v1(24,30.38) v1(24.25,14.48) v1(24.2,4.98) v1(24.35,58.23) v1(24.45,18.48) v1(24.54,61.45) v1(24.5,25.73) v1(24.5,1.88) v1(24.55,60.48) v1(24.55,35.93) v1(24.65,31.63) v1(24.8,28.13) v1(24.9,65.98) v1(25,64.08) v1(25.3,34.58) v1(25.3,15.68) v1(25.4,12.18) v1(25.6,67.58) v1(25.6,58.28) v1(25.6,44.88) v1(25.6,43.28) v1(25.7,38.88) v1(25.75,61.45) v1(25.75,45.98) v1(25.75,37.33) v1(25.8,24.78) v1(25.8,20.48) v1(25.8,13.68) v1(26.4,62.63) v1(26.4,12.68) v1(26.6,65.33) v1(26.55,29.33) v1(26.6,14.48) v1(26.9,66.48) v1(26.95,11.28) v1(27.1,46.98) v1(27.25,67.38) v1(27.24,58.36) v1(27.25,44.83) v1(27.4,43.88) v1(27.53,63.74) v1(27.5,62.68) v1(27.7,42.88) v1(27.8,47.18) v1(27.9,44.58) v1(27.9,38.93) v1(27.85,16.43) v1(27.9,5.13) v1(28.1,66.48) v1(28.1,61.78) v1(28.1,61.13) v1(28.1,43.78) v1(28.05,34.68) v1(28.45,63.58) v1(28.4,42.38) v1(28.35,21.18) v1(28.5,47.28) v1(28.5,3.58) v1(28.7,11.98) v1(28.8,49.78) v1(28.75,32.33) v1(28.85,48.98) v1(29.3,5.18) v1(29.5,67.98) v1(29.5,67.03) v1(29.5,65.53) v1(29.52,53.22) v1(29.5,48.98) v1(29.62,64.07) v1(29.6,52.38) v1(29.58,51.52) v1(29.6,50.68) v1(29.7,42.43) v1(29.8,4.68) v1(30.2,48.98) v1(30.2,10.58) v1(30.45,16.43) v1(30.4,13.38) v1(30.5,43.18) v1(30.5,38.93) v1(30.75,64.03) v1(30.75,63.13) v1(30.8,46.48) v1(30.9,45.48) v1(31,44.38) v1(31,10.53) v1(31.05,62.33) v1(31.05,61.43) v1(31.05,60.53) v1(31.05,59.58) v1(31.1,32.38) v1(31.2,53.16) v1(31.2,43.58) v1(31.3,52.38) v1(31.29,51.53) v1(31.3,50.68) v1(31.27,49.8) v1(31.3,42.68) v1(31.6,63.23) v1(31.6,24.78) v1(31.65,19.78) v1(31.75,62.33) v1(31.75,61.43) v1(31.75,60.53) v1(31.75,59.58) v1(31.75,58.58) v1(31.85,64.08) v1(31.95,43.68) v1(32.2,34.78) v1(32.45,63.48) v1(32.45,62.33) v1(32.45,61.43) v1(32.45,60.53) v1(32.45,59.58) v1(32.45,58.58) v1(32.7,43.78) v1(32.8,38.88) v1(32.8,10.53) v1(32.95,53.17) v1(32.9,36.78) v1(33,52.38) v1(32.97,51.5) v1(33,50.68) v1(32.97,49.78) v1(33.1,16.43) v1(33.25,33.63) v1(33.5,43.78) v1(33.6,43.08) v1(33.65,29.38) v1(33.6,8.08) v1(33.7,44.68) v1(33.7,13.28) v1(33.7,9.38) v1(34,41.98) v1(34.05,20.33) v1(34.25,42.78) v1(34.3,10.58) v1(34.5,62.88) v1(34.5,62.03) v1(34.5,61.13) v1(34.5,60.08) v1(34.5,59.23) v1(34.5,58.23) v1(34.65,43.78) v1(34.8,55.13) v1(34.9,34.78) v1(34.9,24.88) v1(34.9,16.58) v1(34.95,57.73) v1(35,36.78) v1(35,32.53) v1(35.1,64.03) v1(35.15,21.73) v1(35.2,62.53) v1(35.2,61.73) v1(35.21,60.69) v1(35.25,41.98) v1(35.2,38.93) v1(35.25,4.83) v1(35.3,43.18) v1(35.3,10.58) v1(35.5,59.88) v1(35.45,59.08) v1(35.45,58.28) v1(35.45,55.88) v1(35.6,17.73) v1(35.7,46.23) v1(35.95,57.73) v1(35.95,42.48) v1(36.05,29.43) v1(36,0.58) v1(36.1,19.13) v1(36.2,13.28) v1(36.4,63.88) v1(36.35,56.83) v1(36.35,56.03) v1(36.5,47.68) v1(36.45,45.48) v1(36.6,62.68) v1(36.65,4.93) v1(36.7,60.78) v1(36.75,58.48) v1(36.9,7.68) v1(36.95,4.08) v1(37.15,44.78) v1(37.3,63.38) v1(37.3,61.98) v1(37.3,10.58) v1(37.4,59.78) v1(37.5,67.98) v1(37.55,66.83) v1(37.55,65.63) v1(37.5,64.43) v1(37.5,57.88) v1(37.45,57.13) v1(37.6,16.28) v1(37.7,0.58) v1(38.1,2.68) v1(38.2,56.63) v1(38.25,19.13) v1(38.2,7.78) v1(38.25,1.48) v1(38.3,23.08) v1(38.4,17.08) v1(38.4,9.88) v1(38.5,45.88) v1(38.55,15.38) v1(38.45,13.48) v1(38.5,8.78) v1(38.5,5.18) v1(38.6,6.88) v1(38.9,42.98) v1(38.95,41.98) v1(38.95,38.83) v1(38.95,36.83) v1(38.95,35.03) v1(38.95,33.18) v1(38.95,31.48) v1(38.95,29.53) v1(38.95,27.53) v1(39.15,0.58) v1(39.25,48.58) v1(39.25,45.13) v1(39.8,47.98) v1(39.85,23.13) v1(39.9,18.98) v1(40.05,63.48) v1(40.25,56.08) v1(40.25,6.08) v1(40.4,10.88) v1(40.45,7.83) v1(40.6,67.73) v1(40.65,65.48) v1(40.75,53.68) v1(40.8,47.03) v1(40.85,60.23) v1(41.15,62.18) v1(41.5,34.48) v1(41.45,21.83) v1(41.45,6.08) v1(41.6,38.18) v1(41.6,36.53) v1(41.75,56.03) v1(41.8,45.98) v1(42.05,23.13) v1(42.1,57.53) v1(42.1,52.08) v1(42.1,48.13) v1(42.2,53.68) v1(42.2,11.68) v1(42.2,9.53) v1(42.3,49.78) v1(42.4,5.43) v1(42.65,35.83) v1(42.6,0.88) v1(42.7,50.93) v1(42.7,45.08) v1(42.7,31.88) v1(42.85,15.53) v1(43.15,1.98) v1(43.4,46.83) v1(43.35,31.13) v1(43.65,52.08) v1(43.65,23.28) v1(43.7,29.93) v1(43.75,50.08) v1(43.8,49.18) v1(43.8,28.78) v1(43.8,26.78) v1(43.85,48.23) v1(44,25.18) v1(44,9.58) v1(44.1,53.68) v1(44.1,11.23) v1(44.2,51.08) v1(44.55,57.48) v1(44.45,2.43) v1(44.85,24.53) v1(45.4,43.53) v1(45.4,40.08) v1(45.35,37.58) v1(45.35,3.13) v1(45.45,55.93) v1(45.5,46.28) v1(45.5,42.58) v1(45.5,41.48) v1(45.45,34.78) v1(45.5,26.68) v1(45.55,13.28) v1(45.6,44.83) v1(45.6,6.18) v1(46,32.58) v1(46.15,61.73) v1(46.15,10.63) v1(46.15,9.08) v1(46.4,3.13) v1(46.5,39.13) v1(46.55,18.83) v1(46.55,15.58) v1(46.75,6.88) v1(46.95,53.68) v1(47.1,45.28) v1(47.1,14.58) v1(47.25,51.58) v1(47.25,22.33) v1(47.3,9.13) v1(47.35,37.78) v1(47.5,40.23) v1(47.55,35.13) v1(47.45,31.08) v1(47.65,29.68) v1(47.8,52.08) v1(47.75,3.13) v1(47.9,33.43) v1(48,61.68) v1(47.95,56.08) v1(48.2,45.03) v1(48.25,40.98) v1(48.3,28.68) v1(48.3,12.88) v1(48.4,26.68) v1(48.65,53.68) v1(48.6,51.68) v1(48.65,10.13) v1(48.7,48.98) v1(48.8,50.48) v1(48.8,24.03) v1(48.85,57.48) v1(48.85,22.33) v1(49.05,7.83) v1(49.15,14.68) v1(49.15,3.13) v1(49.3,39.03) v1(49.4,40.48) v1(49.35,6.08) v1(49.45,46.03) v1(49.5,25.23) v1(49.6,37.68) v1(49.65,34.93) v1(50.25,58.78) v1(50.2,26.68) v1(50.25,22.68) v1(50.25,15.58) v1(50.4,33.23) v1(50.45,40.98) v1(50.55,8.93) v1(50.55,7.38) v1(50.65,54.83) v1(50.6,10.48) v1(50.6,3.13) v1(50.8,17.78) v1(50.75,13.88) v1(50.85,57.48) v1(50.85,51.43) v1(50.9,29.03) v1(50.85,16.43) v1(51.05,44.53) v1(51.2,40.28) v1(51.35,23.48) v1(51.45,56.23) v1(51.6,59.38) v1(51.6,43.13) v1(51.7,61.68) v1(51.8,38.58) v1(51.8,35.98) v1(51.8,32.88) v1(52.05,14.88) v1(52.1,43.98) v1(52.15,30.53) v1(52.15,3.13) v1(52.5,10.48) v1(52.55,8.68) v1(52.5,7.43) v1(52.6,18.03) v1(52.6,16.38) v1(52.8,53.38) v1(52.75,45.03) v1(52.8,43.38) v1(53.05,28.23) v1(53,23.48) v1(53.1,26.38) v1(53.4,40.58) v1(53.4,36.93) v1(53.5,34.28) v1(53.45,31.88) v1(53.5,15.98) v1(53.45,14.08) v1(53.5,3.13) v1(53.6,39.63) v1(53.8,19.33) v1(53.9,56.43) v1(53.9,22.53) v1(53.85,17.18) v1(53.9,7.58) v1(53.95,20.93) v1(54,10.48) v1(53.95,8.93) v1(54.15,61.73) v1(54.1,5.68) v1(54.85,58.73) v1(54.95,24.88) v1(55.55,3.13) v1(56.65,43.33) v1(56.7,41.03) v1(56.9,45.98) v1(57,48.53) v1(57.15,24.88) v1(57.4,67.33) v1(57.35,64.33) v1(57.4,58.63) v1(57.4,56.28) v1(57.6,61.53) v1(58.2,41.78) v1(58.2,3.18) v1(58.35,25.53) v1(58.35,4.08) v1(58.75,61.23) v1(58.75,54.83) v1(58.75,52.28) v1(59.65,27.93) v1(59.7,19.53) v1(59.8,32.83) v1(59.8,31.23) v1(59.8,30.28) v1(59.75,22.03) v1(59.75,21.13) v1(59.75,18.58) v1(59.75,16.98) v1(59.75,16.03) v1(59.8,14.43) v1(59.8,9.23) v1(59.75,8.48) v1(59.75,6.78) v1(59.75,5.93) v1(59.9,45.98) v1(59.85,38.83) v1(59.85,37.88) v1(59.85,36.33) v1(59.9,35.33) v1(59.85,33.78) v1(59.85,13.53) v1(59.85,11.88) v1(59.85,10.98) v1(59.9,3.18) v1(60.1,28.68) v1(60.5,48.58) v1(60.7,41.08) v1(60.85,43.33) v1(61,56.28) v1(61.1,54.23) v1(61.35,24.83) v1(61.5,65.03) v1(61.9,61.33) v1(61.9,58.63) v1(62.65,24.83)
TL_5V: length 77.5
  TOP w0.2: U4.1 15.35,52.53 14.9,52.98 13.78,52.98 13.45,52.64 U4.3
  TOP w0.5: U4.1 16.22,51.8 C30.1 17.82,53.4 18.96,53.4 21.58,56.02 21.58,58 20.6,58.98 18.3,58.98 17.84,59.44 17.84,59.67 17.33,60.18 J26.1 17.33,62.35 16.3,63.38 15.8,63.38 14.45,64.73 12.65,64.73 12,64.08 8.27,64.08 J18.4 0.6,56.41 0.6,45.04 J7.2
  BOTTOM w0.5: J18.9 J18.4 ; J7.5 8.4,31.34 8.4,31.94 11.3,34.84 11.3,35.42 10.89,35.83 9.81,35.83 J7.2
TL_32KI_C3: length 19.1
  TOP w0.2: U1.31 35.36,51.72 36.74,53.1 48.38,53.1 J2.2
TL_32KO_C2: length 14.4
  TOP w0.2: J4.2 44.28,52.7 36.91,52.7 35.43,51.22 U1.30
TL_AS0_C5: length 38.9
  TOP w0.2: J9.6 J8.6 53.55,41.9 53.55,50.55 52.47,51.63 51.62,51.63 48.97,54.28 39.55,54.28 39.32,54.05 36.56,54.05 35.23,52.72 U1.33
TL_AS1_C6: length 31.7
  TOP w0.2: J9.9 J8.9 53.95,49.12 53.95,50.71 52.63,52.03 51.78,52.03 49.13,54.68 39.39,54.68 39.16,54.45 36.4,54.45 35.16,53.22 U1.34
TL_AS2_C7: length 29.9
  TOP w0.2: U1.35 35.1,53.72 36.23,54.85 38.99,54.85 39.22,55.08 49.3,55.08 51.95,52.43 52.8,52.43 55.42,49.81 J8.10 J9.10
TL_BIAS_C4: length 37.1
  TOP w0.2: v1(42,32.98) 42,28.99 42.4,28.59 J20.2 ; v1(39.7,53.65) 36.73,53.65 35.3,52.22 U1.32 ; v1(44.9,32.98) 44.9,33.45 44.8,33.55 44.8,46.28 40.2,50.88 v1(40.2,51.45)
  BOTTOM w0.2: v1(44.9,32.98) v1(42,32.98) ; v1(40.2,51.45) 39.7,51.95 v1(39.7,53.65)
TL_CK_A4: length 50.6
  TOP w0.2: J6.7 3.56,20.32 4.51,21.27 8.79,21.27 9.6,22.08 9.6,28.35 14.76,33.5 19.98,33.5 24.23,37.75 24.23,51.11 24.84,51.72 U1.6
TL_CN_D6: length 44.6
  TOP w0.2: J6.11 3.56,30.48 4.77,31.68 7.9,31.68 8.4,32.18 10.04,32.18 13.76,35.91 18.99,35.91 21.83,38.75 21.83,52.1 24.55,54.82 U1.48
TL_D0: length 51.6
  TOP w0.2: J6.13 3.56,35.56 4.71,36.71 8.17,36.71 8.7,36.18 8.7,34.88 9,34.58 11.31,34.58 13.43,36.7 18.02,36.7 v1(18.8,37.48) ; v1(18.65,39.78) 19.43,40.56 19.43,53.1 23.72,57.39 29.47,57.39 31.48,55.38 U1.42
  BOTTOM w0.2: v1(18.65,39.78) 18.65,39.31 18.8,39.16 v1(18.8,37.48)
TL_D1: length 49.3
  TOP w0.2: J6.12 3.56,33.02 4.73,34.18 11.47,34.18 13.6,36.3 18.43,36.3 v1(19.6,37.48) ; v1(19.54,39.78) 19.54,39.82 19.83,40.11 19.83,52.93 23.89,56.99 29.31,56.99 30.98,55.32 U1.43
  BOTTOM w0.2: v1(19.6,37.48) 19.6,37.95 19.54,38.01 v1(19.54,39.78)
TL_D7: length 45.9
  TOP w0.2: J6.10 3.56,27.94 4.71,29.09 8.1,29.09 8.69,29.68 8.69,30.95 8.65,30.99 8.65,31.43 9,31.78 10.2,31.78 13.93,35.5 19.15,35.5 22.23,38.58 22.23,51.94 24.51,54.22 U1.1
TL_DI_A3: length 48.3
  TOP w0.2: J6.8 3.56,22.86 4.71,24.01 8.53,24.01 9.2,24.68 9.2,28.51 14.59,33.91 19.82,33.91 23.83,37.92 23.83,51.27 24.78,52.22 U1.5
TL_DM_A5: length 20
  TOP w0.2: J27.2 12.39,55.53 17.99,55.53 19.06,56.6 v1(20.18,56.6) ; U1.7 25.12,51.22 v1(25.07,51.17)
  BOTTOM w0.2: v1(20.18,56.6) 22.08,56.6 24.6,54.08 24.6,51.64 v1(25.07,51.17)
TL_DMICCK_A1: length 70.2
  TOP w0.2: v1(12.48,20.46) 12.48,27.2 v1(11.42,28.26) ; v1(11.7,17.28) 11.7,16.81 11.33,16.44 11.32,16.44 11.09,16.22 11.09,10.47 13.23,8.33 16.98,8.33 17.7,7.61 17.7,4.08 J40.2 ; U1.3 24.64,53.22 23.03,51.6 23.03,38.25 19.48,34.7 14.26,34.7 10.33,30.78 v1(9.8,30.78)
  BOTTOM w0.2: v1(9.8,30.78) 11.09,29.49 11.09,28.59 v1(11.42,28.26) ; v1(11.7,17.28) 11.7,17.61 12.1,18.01 12.1,20 12.25,20.15 12.25,20.23 v1(12.48,20.46)
TL_DMICDI_A0: length 65.6
  TOP w0.2: J41.2 13.82,7.18 10.69,10.31 10.69,16.59 v1(11.04,16.94) ; v1(10.95,27.71) 12.08,26.58 12.08,21.23 11.7,20.85 v1(11.7,20.38) ; U1.2 24.58,53.72 22.63,51.77 22.63,38.42 19.32,35.1 14.09,35.1 10.32,31.33 9.35,31.33 v1(9.2,31.18)
  BOTTOM w0.2: v1(11.7,20.38) 11.7,18.18 11.04,17.52 v1(11.04,16.94) ; v1(10.95,27.71) 10.6,28.06 10.6,29.08 9.2,30.48 v1(9.2,31.18)
TL_DO_A2: length 46.2
  TOP w0.2: J6.9 3.56,25.4 4.8,26.63 8.35,26.63 8.8,27.08 8.8,28.68 14.43,34.3 19.65,34.3 23.43,38.08 23.43,51.44 24.71,52.72 U1.4
TL_DP_A6: length 27.1
  TOP w0.2: v1(20.1,57.48) 19.37,57.48 17.82,55.93 14.29,55.93 13.83,56.39 9.05,56.39 J28.2 ; U1.8 26.06,50.72 26.06,50.67 v1(25.59,50.67)
  BOTTOM w0.2: v1(20.1,57.48) 19.59,56.97 19.59,56.38 19.92,56.05 22.03,56.05 24.2,53.88 24.2,51.26 24.84,50.62 25.54,50.62 v1(25.59,50.67)
TL_IO: length 64.5
  TOP w0.2: J35.2 12.43,44.71 12.43,45.05 12.03,45.45 12.03,51.7 12.03,51.71 v1(12.03,52.44) ; v1(13.5,58.08) 15.1,58.08 R12.2
  TOP w0.5: J35.2 13.25,43.39 v1(13.25,40.48) ; v1(13.2,37.28) 12.76,36.84 12.31,36.84 v1(10.6,35.13) ; U2.6 18.72,12.88 C22.1 19.8,13.58 18.3,15.08 v1(12.34,15.08)
  BOTTOM w0.2: v1(13.5,58.08) 13.5,54.58 12.03,53.11 v1(12.03,52.44)
  BOTTOM w0.5: v1(13.25,40.48) 13.25,39.86 13.2,39.81 v1(13.2,37.28) ; v1(12.34,15.08) 11.7,15.08 10,16.78 10,17.88 5.57,22.31 5.57,31.04 J7.4 8.49,33.02 v1(10.6,35.13)
TL_KEY_B2: length 66.1
  TOP w0.2: U1.20 31.98,47.47 37.1,42.35 37.1,33.3 35.38,31.58 SW3.3 SW3.1 24.55,29.33 24.35,29.33 SW2.1 SW2.3 15.9,25 14.88,23.98 14.88,20.25 14.36,19.74 11.37,19.74 9.09,17.47 9.09,14.25 J13.4 J6.4
TL_KEY_B3: length 71.6
  TOP w0.2: J6.3 J13.3 9.49,12.11 9.49,17.3 11.53,19.34 14.91,19.34 16,20.44 SW4.1 SW4.3 SW5.1 SW5.3 35.5,22.78 36.65,23.93 36.65,27.22 37.5,28.07 37.5,42.51 32.48,47.53 U1.21
TL_KEY_B4: length 96.6
  TOP w0.2: SW2.2 SW2.4 14.6,30.28 14.6,24.27 14.26,23.93 v1(14.26,20.42) ; J6.2 J13.2 9.89,9.97 9.89,17.14 10.98,18.23 14.9,18.23 14.96,18.28 SW4.2 SW4.4 23.32,17.16 33.57,17.16 34.37,17.96 34.37,18.96 37.6,22.19 37.6,25.83 37.75,25.98 37.75,26.71 37.9,26.86 37.9,42.68 32.98,47.6 U1.22
  BOTTOM w0.2: v1(14.26,20.42) 14.88,19.8 14.88,19.41 SW4.2
TL_KEY_B5: length 88.6
  TOP w0.2: v1(38.3,26.48) 38.3,42.84 33.48,47.66 U1.23 ; SW5.2 SW5.4 37.2,22.38 v1(37.2,26.48) ; J6.1 J13.1 8.69,6.23 8.69,8.17 10.29,9.77 10.29,16.97 11.15,17.83 14.86,17.83 15.53,17.16 22.76,17.16 23.31,16.6 v1(25.4,16.6) ; SW3.2 SW3.4
  BOTTOM w0.2: v1(25.4,16.6) 25.73,16.94 25.73,17.11 SW5.2 ; v1(38.3,26.48) v1(37.2,26.48) 36.4,26.48 35.8,27.08 SW3.4
TL_P0_D5: length 39.5
  TOP w0.2: J38.7 10.08,39.2 11.25,38.03 20.27,38.03 21.43,39.19 21.43,52.27 24.55,55.39 28.64,55.39 28.98,55.05 U1.47
TL_P1N_D3: length 45.6
  TOP w0.2: U1.45 29.98,55.19 28.98,56.19 24.22,56.19 20.63,52.6 20.63,39.53 19.93,38.83 11.58,38.83 10.88,39.53 10.88,42.48 11.63,43.23 11.63,44.72 11.23,45.12 11.23,48.01 J38.3
TL_P2N_D4: length 42.8
  TOP w0.2: U1.46 29.48,55.12 28.81,55.79 24.39,55.79 21.03,52.43 21.03,39.36 20.1,38.43 11.42,38.43 10.48,39.36 10.48,42.65 11.23,43.4 11.23,44.55 10.83,44.95 10.83,45.87 J38.5
TL_P3_D2: length 48.3
  TOP w0.2: J38.1 11.63,50.15 11.63,45.28 12.03,44.88 12.03,43.07 11.28,42.32 11.28,39.7 11.75,39.23 19.77,39.23 20.23,39.69 20.23,52.76 24.06,56.59 29.14,56.59 30.48,55.25 U1.44
TL_PGAN0_C1: length 36.7
  TOP w0.2: U1.29 35.49,50.72 36.55,51.78 C28.1 37.52,52.3 38.56,52.3 38.95,51.91 38.95,50.5 43.65,45.8 43.65,32.33 45.5,30.48 48.64,30.48 J25.2
TL_PGAP0_C0: length 31.3
  TOP w0.2: U1.28 35.56,50.22 36.12,50.78 C25.2 37.52,50.26 38.62,50.26 43.25,45.63 43.25,32.16 45.33,30.08 46.4,30.08 47,29.48 J22.2
TL_RST: length 175.8
  TOP w0.2: v1(59.75,52.03) 59.75,55.93 58.2,57.48 54.4,57.48 53.25,58.63 53.25,59.48 52,60.73 SW1.3 SW1.1 43.7,58.78 43.2,58.28 41.2,58.28 38.5,55.58 C15.2 37.12,55.25 36.06,55.25 35.03,54.22 U1.36
  BOTTOM w0.2: v1(59.75,52.03) 59.05,51.33 59.05,5.83 56.9,3.68 43.15,3.68 41.45,5.38 39.7,5.38 35.45,1.13 15.6,1.13 15.1,1.63 15.1,3.58 13.6,5.08 11.3,5.08 10,3.78 5.8,3.78 4,5.58 4,32.01 J7.3
TL_SDMN1_B7: length 54.3
  TOP w0.2: J17.1 24.8,11.55 24.8,13.53 26.7,15.43 35.92,15.43 39.28,18.79 39.28,23.42 39.95,24.09 39.95,43.43 35.18,48.2 35.18,48.29 34.75,48.72 U1.25
TL_SDMP1_B6: length 53.8
  TOP w0.2: U1.24 34.61,48.12 35.24,47.49 39.55,43.18 39.55,24.25 38.88,23.58 38.88,18.96 35.75,15.83 26.53,15.83 24.4,13.7 24.4,11.05 J16.1
TL_SWS_A7: length 53.6
  TOP w0.2: v1(1.6,58.78) 1.6,64.38 2.82,65.6 11.93,65.6 12.11,65.78 19.6,65.78 22.1,63.28 22.1,59.39 23.1,58.39 v1(23.1,57.78) ; U1.9 26.11,50.22 v1(25.14,49.24)
  BOTTOM w0.2: v1(1.6,58.78) 1.61,58.78 J18.5 ; v1(23.1,57.78) 25.9,54.98 25.9,52.48 26.9,51.48 26.9,49.88 26.26,49.24 v1(25.14,49.24)
  BOTTOM w0.5: J18.8 J18.5
TL_URX_B0: length 50.6
  TOP w0.2: U1.10 26.39,49.72 24.78,48.11 24.78,46.29 24.63,46.14 24.63,37.59 20.15,33.1 14.92,33.1 10,28.18 10,27.06 10.15,26.91 10.15,19.66 8.27,17.78 J13.6 J6.6
TL_UTX_B1: length 52.2
  TOP w0.2: U1.11 26.46,49.22 25.18,47.94 25.18,46.12 25.03,45.97 25.03,37.42 20.31,32.7 15.09,32.7 10.4,28.02 10.4,27.23 10.55,27.08 10.55,19.49 8.69,17.63 8.69,16.39 J13.5 J6.5
TL_VANT: length 123.9
  TOP w0.2: 29.2,46.98 29.37,47.15 29.37,47.46 29.48,47.57 U1.15 ; U1.26 36.06,49.22 C13.1 37.2,48.08 v1(37.4,48.08) ; U1.27 36.96,49.72 C12.1 37,49.38 v1(37.2,49.18)
  TOP w0.3: C16.1 28.3,46.58 28.8,46.58 29.2,46.98
  TOP w0.5: v1(37.4,48.08) 41.2,44.28 v1(41.2,40.98) ; v1(18.4,40.48) v1(18.4,41.28) v1(18.4,42.08) 18.4,42.98 C29.1 18.34,43.64 J29.2 16.04,43.64 J35.1 ; v1(26.43,41.98) 26.43,45.73 26.78,46.08 C16.1 ; v1(37.2,49.18) 37.5,48.88 37.9,48.88 42,44.78 v1(42,39.88) ; v1(26.28,39.88) v1(35.7,39.88) ; v1(26.28,40.98) v1(35.7,40.98)
  BOTTOM w0.5: v1(18.4,42.08) 25.71,42.08 25.81,41.98 v1(26.43,41.98) ; v1(26.28,40.98) 23,40.98 22.7,41.28 v1(18.4,41.28) ; v1(18.4,40.48) 21.8,40.48 22.4,39.88 v1(26.28,39.88) ; J35.1 11.8,44.48 11.8,43.96 9.92,42.08 6.55,42.08 3.56,45.07 J18.6 J18.7 ; v1(35.7,40.98) v1(41.2,40.98) ; v1(35.7,39.88) v1(42,39.88)
TL_XC1: length 10.7
  TOP w0.2: U1.40 32.48,55.51 29.8,58.19 29.05,58.19 28.57,58.67 28.57,60.47 29.49,61.39 Y1.3 29.54,62.94 C3.2
TL_XC2: length 9
  TOP w0.2: U1.41 31.98,55.45 29.64,57.79 28.68,57.79 Y1.1 26.09,59.46 26.07,59.48 C4.2
N19472288: length 2.4
  TOP w0.2: J38.4 6.82,49.88 R4.1
N19472291: length 3.5
  TOP w0.2: J38.8 5.81,45.81 5.81,46.27 R6.1
N19472372: length 10.4
  TOP w0.2: J16.2 23.87,7.98 31.2,7.98 31.6,8.38 L4.1
N19472375: length 10.6
  TOP w0.2: L5.1 35.9,8.08 35.1,7.28 28.8,7.28 28.33,6.81 J17.2
N19472414: length 16
  TOP w0.2: J39.2 24.9,4.58 27.25,4.58 27.55,4.28 27.55,3.18 28.15,2.58 30.6,2.58 C20.2 C21.1 32.2,3.68 33.51,4.99 33.51,5.87 33.23,6.16 L4.2
N19472431: length 13.9
  TOP w0.2: C21.2 33.2,4.08 34,4.88 34,5.88 34.27,6.16 L5.2 ; C21.2 32.68,2.66 31.25,2.66 30.77,2.18 27.44,2.18 J39.1 ; C21.2 C23.1
N19472505: length 2.2
  TOP w0.2: R3.1 6.36,51.48 6.57,51.7 J38.2
N19497696: length 2.8
  TOP w0.2: R5.1 5.81,47.87 6.28,47.87 J38.6
N19519268: length 6.5
  TOP w0.2: C11.2 50.67,42.51 50.67,42.57 Y2.2 49.9,43.34 R1.2 49.9,45.44 J2.1
N19519271: length 6.6
  TOP w0.2: C10.2 48.09,42.57 48.13,42.57 Y2.1 48.9,43.34 R1.1 48.9,45.54 J4.1
N19526123: length 9.7
  TOP w0.2: R11.2 R12.1 14.8,58.58 14.45,58.93 9.05,58.93 J28.1
N19526133: length 2.8
  TOP w0.2: R11.1 16.6,59.01 16.42,59.19 16.25,59.19 15.73,59.71 J26.3
N19526168: length 2.8
  TOP w0.2: J26.2 16.53,59.65 R10.1
N19527038: length 6
  TOP w0.2: R10.2 17.05,57.03 14.75,57.03 14.29,57.49 12.39,57.49 J27.1
N19571642: length 3.1
  TOP w0.2: 31.48,47.4 32,46.88 32.6,46.28 32.9,45.98 C19.1
  TOP w0.25: 31.48,47.4 U1.19
N19571697: length 2.3
  TOP w0.25: U1.13 27.8,48.12 27.56,47.88 C14.2
N19571729: length 5.1
  TOP w0.2: L3.1 29.4,43.58 30.17,44.35 30.17,47.13 30.48,47.44 U1.17
N19571735: length 2.8
  TOP w0.2: U1.16 29.98,47.51 29.77,47.3 29.77,46.78 29.3,46.31 L3.2
N19572953: length 1.9
  TOP w0.5: C8.2 C6.2 L2.1
N19572955: length 3.8
  TOP w0.25: 33.48,56.51 U1.38
  TOP w0.5: C8.1 C5.2 L1.2 33.48,56.51
N19572993: length 3.1
  TOP w0.25: L1.1 34.48,55.98 33.98,55.48 U1.37
  TOP w0.5: L1.1 35.46,56.74 C9.1
N19573037: length 3.8
  TOP w0.5: J1.1 C7.2 L2.2
N19581488: length 5.9
  TOP w0.2: R7.1 40.5,23.08 J20.1
N19581490: length 9.6
  TOP w0.2: J25.1 49.6,22.98 45.1,22.98 C27.1 R9.2
N19581502: length 3.7
  TOP w0.2: U3.4 42.46,17.52 42.36,17.52 C26.1 41.5,18.98 R7.2
N19581582: length 7.7
  TOP w0.2: R8.1 R9.1 42.72,22.6 44.15,22.6 44.93,23.38 46.6,23.38 47,23.78 J22.1
N19581635: length 1
  TOP w0.2: R8.2 C24.1
N19581732: length 18.1
  TOP w0.2: J23.2 43.95,7.68 45.1,8.83 45.1,11.68 47.2,13.78 49.7,13.78 51.64,15.72 J37.1
N19602515: length 4.2
  TOP w0.2: J36.2 J37.2 48.4,21.08 C24.2
N19606656: length 9.4
  TOP w0.2: J40.1 20.19,4.03 20.19,8.69 19.8,9.08 R2.2 19.29,9.98 19.14,10.13 U2.4
N19606659: length 6.2
  TOP w0.2: U2.5 17.2,10.81 17.2,9.38 18,8.58 18.71,8.58 19.04,8.25 J41.1
N19611810: length 5.9
  TOP w0.2: J9.5 J8.5
N19611817: length 5.9
  TOP w0.2: J9.4 J8.4
N19611824: length 5.9
  TOP w0.2: J9.3 J8.3
N19611831: length 5.9
  TOP w0.2: J9.2 J8.2
N19611838: length 5.9
  TOP w0.2: J9.1 J8.1
N19611845: length 5.9
  TOP w0.2: J9.8 J8.8
N19611852: length 5.8
  TOP w0.2: J12.8 J11.8
N19611859: length 5.8
  TOP w0.2: J12.6 J11.6
N19611866: length 5.8
  TOP w0.2: J12.7 J11.7
N19611873: length 5.8
  TOP w0.2: J12.5 J11.5
N19611880: length 5.8
  TOP w0.2: J12.4 J11.4
N19611887: length 5.8
  TOP w0.2: J12.3 J11.3
N19611894: length 5.8
  TOP w0.2: J12.2 J11.2
N19611901: length 5.8
  TOP w0.2: J12.1 J11.1
N194723011: length 1.3
  TOP w0.2: D4.A R6.2
N194723090: length 1.3
  TOP w0.2: R3.2 D1.A
N194723171: length 1.3
  TOP w0.2: R4.2 D2.A
N194723250: length 1.3
  TOP w0.2: D3.A R5.2
N195815302: length 4.8
  TOP w0.2: J36.1 45.4,17.88 U3.1

## Copper pours and planes (outline as drawn; the poured copper is in the pictures)
GND on TOP: 10.2,0.3 7.66,2.84 1,2.84 0.51,3.05 0.3,3.54 0.3,65.53 1.1,67.48 3.05,68.28 31.9,68.28 31.9,64.38 32.7,63.58 32.7,56.68 32.5,56.48 34.25,56.48 34.25,63.73 35.1,64.58 35.1,68.28 60.29,68.28 62.24,67.48 63.04,65.53 63.04,4.19 61.69,2.84 45.26,2.84 42.72,0.3 ; 34 cut-outs
GND on BOTTOM: 10.2,0.3 7.66,2.84 1,2.84 0.51,3.05 0.3,3.54 0.3,65.53 1.1,67.48 3.05,68.28 60.29,68.28 62.24,67.48 63.04,65.53 63.04,4.19 61.69,2.84 45.26,2.84 42.72,0.3 ; 26 cut-outs

## Text on the board
User.Comments: RESET | IOREF | 3V3 | 5V | TX | RX | # | SCL | AREF | GND | 13 | 12 | 11 | 10 | 9 | 8 | 7 | 6 | 5 | 4 | 3 | 2 | 1 | 0 | SDA | A0 | A5 | VIN | A2 | A1 | A4 | A3 | [#=PWM] | www.arduino.cc | UNO_Rev3.01 | POWER | ANALOG IN | L | ON | DIGITAL | R10 | R9 | ESD1 | D1 | X1 | E1 | E2 | C3 | C4 | C5 | Cp1 | U2 | ZU4 | C12 | C2 | U1 | R2 | R1 | R3 | R8 | U5' | U5 | C8 | C10 | D2 | F1 | C1 | T1 | R6 | U3 | R14 | R15 | ICSP | R13 | Y2 | R12 | R7 | C11 | C9 | R4 | RESET-EN | R11 | C6 | L1 | X2 | C7 | Y1 | IOL | IOH | GROUND | Xduino
Ref Des/Silkscreen Top: PD0 | PD1 | PD6 | PD7 | PA2 | PA3 | PA4 | PB0 | PB1 | PB2 | PB3 | PB4 | PB5 | 5V | NC | RST | 3V3OUT | GND | PA1/DCK | PA0/DDI | B_D2 | G_D3 | W_D4 | R_D5 | AudioOut | PC7 | PC6 | PC5 | SWS | 3V3 | DP/A6 | DM/A5 | 3V3CHIP | 3V3LDO | PB6/SP1 | PB7/SN1 | PC4/ABIAS | PC0/PP0 | C2/32KO | PC1/PN0 | C3/32KI | TLSR8258DK48 | C1T139A30_V1.2 | 2018-10-18
User.7: FIGURE | SIZE | 0.3 | 0.5 | 0.9 | 1.0 | DRILL CHART: TOP to BOTTOM | ALL UNITS ARE IN MILLIMETERS | PLATED | NON-PLATED | QTY | 782 | 2 | 109 | 20
